# Altium PCB main.PcbDoc
Units mm, origin at the board's own origin, x right, y up, seen from the top; angles counter-clockwise.
Board outline 95 x 45.72 mm, 2 copper layers (Top Layer, Bottom Layer); 48 components, 29 nets, 216 pads, 31 vias.
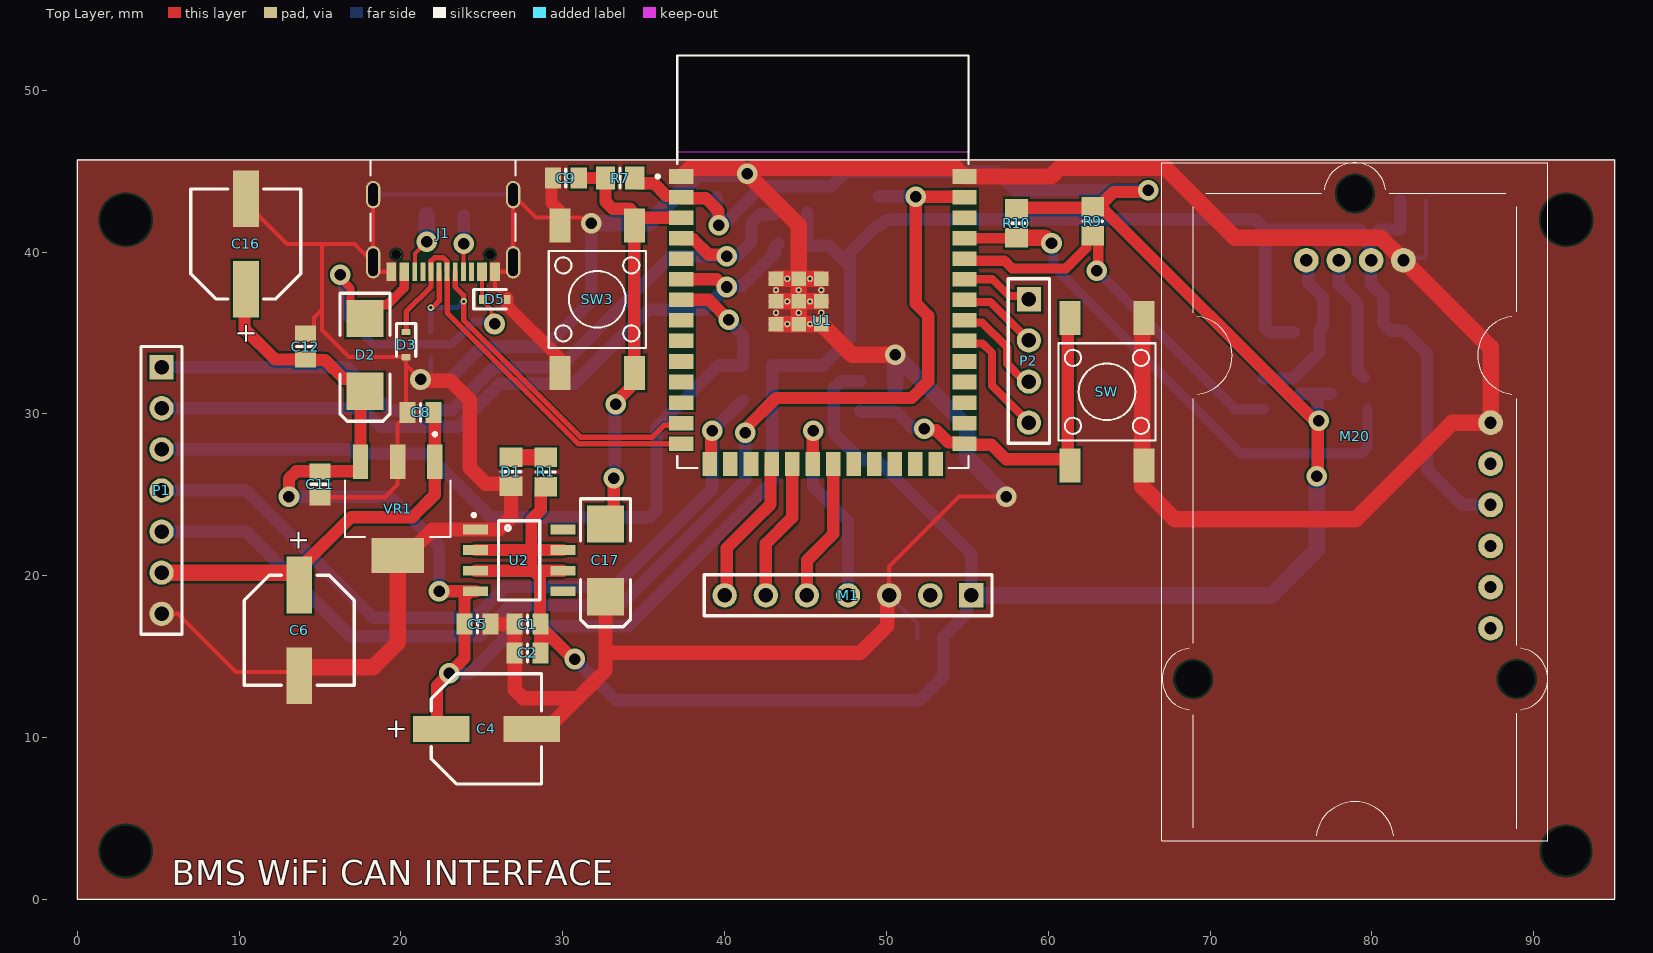
[diagram p0: Top Layer view]
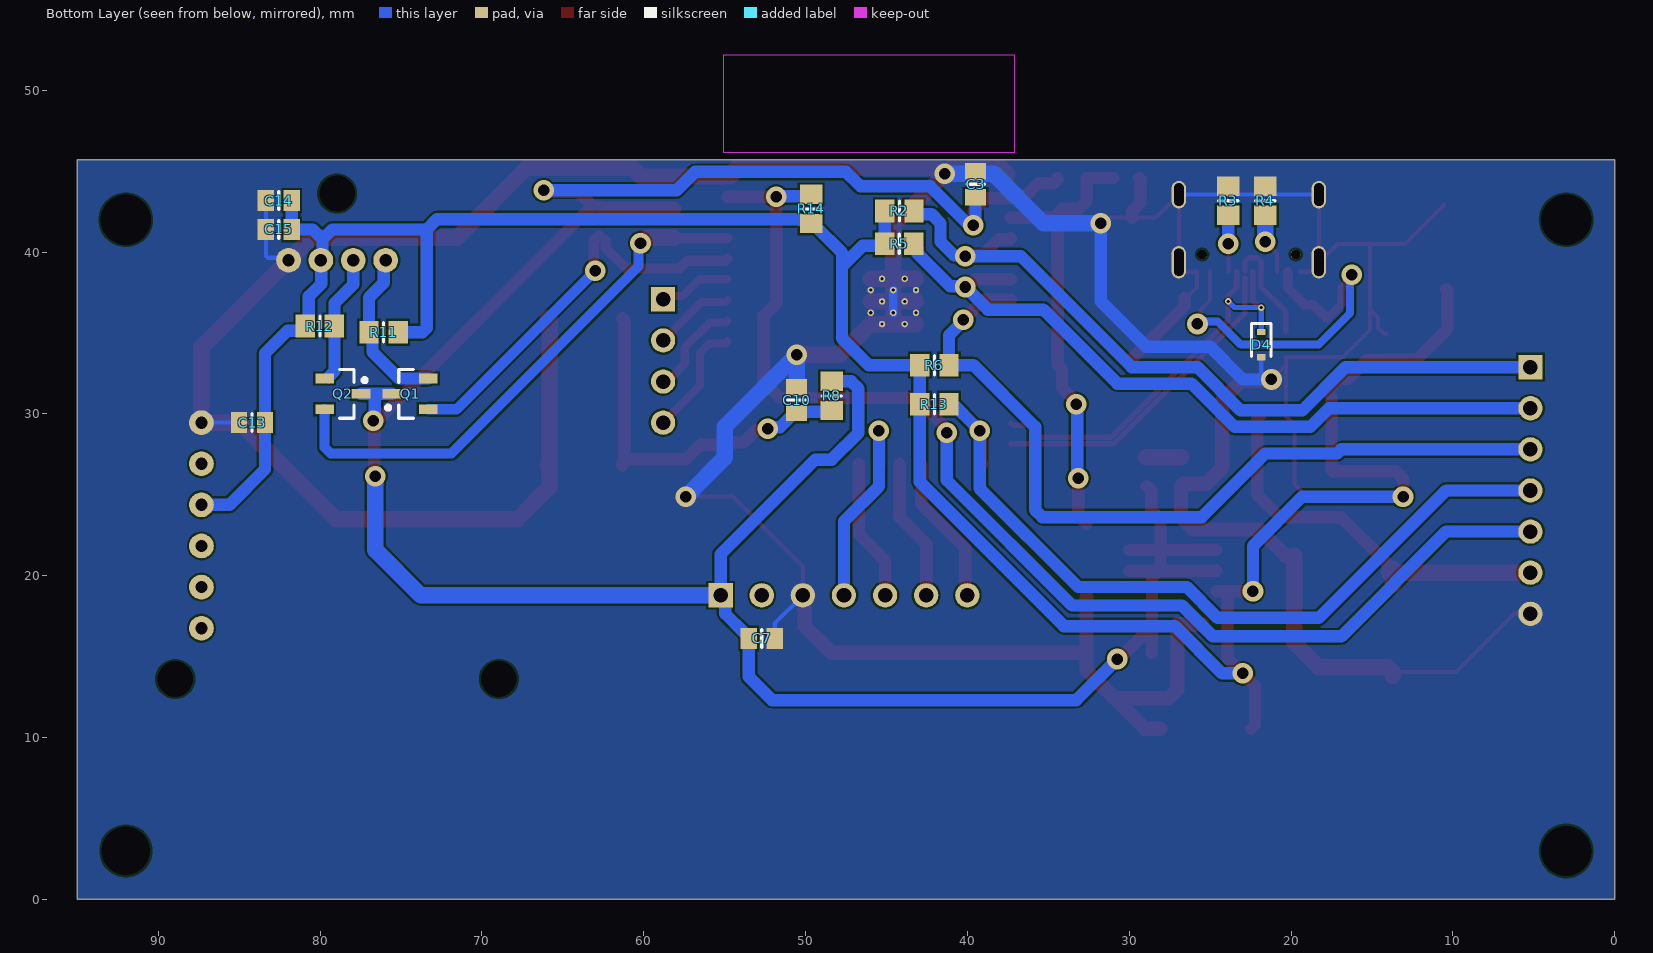
[diagram p1: Bottom Layer view, seen from below]

## Layer stack, top to bottom
Top Solder: solder mask 0.0102, Solder Resist, Dk 3.5
Top Layer: signal copper 0.0356
Dielectric 1: dielectric 0.32, FR-4, Dk 4.8
Bottom Layer: signal copper 0.0356
Bottom Solder: solder mask 0.0102, Solder Resist, Dk 3.5

## Board outline
0,0 0,45.72 95,45.72 95,0

## Design rules (kind name [scope] priority, off if disabled: settings)
Clearance Clearance_1 [InDifferentialPairClass('All Differential Pairs') And OnMid vs OnMid] p1: gap=0.076 ignorepadtopadclearanceinfootprint=FALSE sourcerule=54 cellrowname="All Differential Pairs" cellrowtype=4 cellcolname=All cellcoltype=0 innerlayers=TRUE
Clearance Clearance_2 [InDifferentialPairClass('All Differential Pairs') And (ExistsOnLayer('Top Layer') Or ExistsOnLayer('Bottom Layer')) vs (ExistsOnLayer('Top Layer') Or ExistsOnLayer('Bottom Layer'))] p2: gap=0.076 ignorepadtopadclearanceinfootprint=FALSE sourcerule=54 cellrowname="All Differential Pairs" cellrowtype=4 cellcolname=All cellcoltype=0 outerlayers=TRUE
Clearance Clearance_3 [InDifferentialPairClass('All Differential Pairs')] p3: gap=0.254 ignorepadtopadclearanceinfootprint=FALSE sourcerule=54 cellrowname="All Differential Pairs" cellrowtype=4 cellcolname=All cellcoltype=0
Clearance Clearance_1 [OnMid vs OnMid] p4: gap=0.127 ignorepadtopadclearanceinfootprint=FALSE sourcerule=54 cellrowname=All cellrowtype=0 cellcolname=All cellcoltype=0 innerlayers=TRUE
Clearance Clearance_2 [(ExistsOnLayer('Top Layer') Or ExistsOnLayer('Bottom Layer')) vs (ExistsOnLayer('Top Layer') Or ExistsOnLayer('Bottom Layer'))] p5: gap=0.127 ignorepadtopadclearanceinfootprint=FALSE sourcerule=54 cellrowname=All cellrowtype=0 cellcolname=All cellcoltype=0 outerlayers=TRUE
Clearance [All] p6: gap=0.254 ignorepadtopadclearanceinfootprint=FALSE ismatrix=TRUE miname0="All Differential Pairs" mitype0=4
DiffPairsRouting DiffPair_diff90DiffPairsRouting [InDifferentialPair('diff90')] p1: maxlimit=0.076 minlimit=0.076 mostfreqgap=0.076 toplayer_minwidth=0.33 toplayer_maxwidth=0.33 toplayer_prefwidth=0.33 bottomlayer_minwidth=0.33 bottomlayer_maxwidth=0.33 bottomlayer_prefwidth=0.33 maxuncoupledlength=2.54
DiffPairsRouting DifferentialPairsRouting_1 [InDifferentialPairClass('All Differential Pairs')] p2: maxlimit=0.254 minlimit=0.254 mostfreqgap=0.254 toplayer_minwidth=0.381 toplayer_maxwidth=0.381 toplayer_prefwidth=0.381 bottomlayer_minwidth=0.381 bottomlayer_maxwidth=0.381 bottomlayer_prefwidth=0.381 maxuncoupledlength=1.27
DiffPairsRouting [All] p3: maxlimit=0.254 minlimit=0.254 mostfreqgap=0.254 toplayer_minwidth=0.381 toplayer_maxwidth=0.381 toplayer_prefwidth=0.381 bottomlayer_minwidth=0.381 bottomlayer_maxwidth=0.381 bottomlayer_prefwidth=0.381 maxuncoupledlength=12.7
MatchedLengths DiffPair_diff90MatchedLengths [InDifferentialPair ('diff90')] p1: tolerance=25.4 checknetsindiffpair=FALSE checkdiffpairvsdiffpair=TRUE checkxsignals=TRUE checkothers=TRUE
PlaneConnect PowerPlaneConnectStyle_2 [All] p1: planeconnectstyle=Relief reliefexpansion=0.508 reliefentries=2 reliefconductorwidth=0.254 reliefairgap=0.254
PlaneConnect PowerPlaneConnectStyle_1 [All] p2: planeconnectstyle=Relief reliefexpansion=0.508 reliefentries=2 reliefconductorwidth=0.254 reliefairgap=0.254
PlaneConnect [All] p3: planeconnectstyle=Relief reliefexpansion=0.508 reliefentries=4 reliefconductorwidth=0.254 reliefairgap=0.254
PolygonConnect PolygonConnect_4 [All vs IsNamedPolygon('GND_L02_P000')] p1: connectstyle=Direct reliefconductorwidth=0.254 reliefentries=4 polygonreliefangle="90 Angle" airgapwidth=0.254
PolygonConnect PolygonConnect_3 [All vs IsNamedPolygon('GND_L01_P001')] p2: connectstyle=Direct reliefconductorwidth=0.254 reliefentries=4 polygonreliefangle="90 Angle" airgapwidth=0.254
PolygonConnect PolygonConnect_2 [All vs IsNamedPolygon('GND_L02_P000')] p3: thpad.connectstyle=Direct thpad.reliefconductorwidth=0.254 thpad.reliefentries=4 thpad.polygonreliefangle="90 Angle" thpad.airgapwidth=0.254 smdpad.connectstyle=Direct smdpad.reliefconductorwidth=0.254 smdpad.reliefentries=4 smdpad.polygonreliefangle="90 Angle" smdpad.airgapwidth=0.254 via.connectstyle=Relief via.reliefconductorwidth=0.254 via.reliefentries=4 via.polygonreliefangle="90 Angle" via.airgapwidth=0.254
PolygonConnect PolygonConnect_1 [All vs IsNamedPolygon('GND_L01_P001')] p4: thpad.connectstyle=Direct thpad.reliefconductorwidth=0.254 thpad.reliefentries=4 thpad.polygonreliefangle="90 Angle" thpad.airgapwidth=0.254 smdpad.connectstyle=Direct smdpad.reliefconductorwidth=0.254 smdpad.reliefentries=4 smdpad.polygonreliefangle="90 Angle" smdpad.airgapwidth=0.254 via.connectstyle=Relief via.reliefconductorwidth=0.254 via.reliefentries=4 via.polygonreliefangle="90 Angle" via.airgapwidth=0.254
PolygonConnect PolygonConnectStyle_1 [All] p5: connectstyle=Relief reliefconductorwidth=0.254 reliefentries=2 polygonreliefangle="0 Angle" airgapwidth=0.254
PolygonConnect [All] p6: connectstyle=Relief reliefconductorwidth=0.254 reliefentries=4 polygonreliefangle="90 Angle" airgapwidth=0.254
RoutingVias [All] p1: holewidth=0.711 width=1.27 viastyle="Through Hole" minholewidth=0.711 minwidth=1.27 maxholewidth=0.711 maxwidth=1.27
SolderMaskExpansion [All] p1: expansion=0.102 istentingtop=FALSE
SupplyNets "Schematic Supply Nets_3" [InNet('GND')] p1: voltage=0.000
SupplyNets "Schematic Supply Nets_2" [InNet('GND')] p2: voltage=0.000
SupplyNets "Schematic Supply Nets_1" [InNet('GND')] p3: voltage=0.000
SupplyNets "Schematic Supply Nets" [InNet('GND')] p4: voltage=0.000
Width MaxMinWidth_1 [InxNetClass('All xNets')] p1: maxlimit=1.016 minlimit=0.254 preferedwidth=0.254 minimp=50.000000 maximp=50.000000 favimp=50.000000
Width [All] p2: maxlimit=0.254 minlimit=0.254 preferedwidth=0.254
28 further rules are at their usual default settings.

## Classes and differential pairs
component class ESP32: C3 C9 C10 C13 C14 C15 C17 M20 P2 Q1 Q2 R7 R8 R9 R10 R11 R12 SW SW3 U1
component class Peripherals: C1 C2 C4 C5 C6 C7 C8 C11 C12 C16 D1 D2 D3 D4 D5 J1 M1 P1 R1 R2 R3 R4 R5 R6 R13 R14 U2 VR1
differential pair diff90: +D_P -D_N

## Components (designator, comment, footprint, x,y, rotation, side; value= is the part's Value field where it differs from the comment)
C1 "Cap" 6-0805_L 27.813,17.018 r0 top value=10uF
C2 "Cap" 6-0805_L 27.813,15.24 r0 top value=100nF
C3 "Cap" 6-0805_L 39.497,44.196 r270 bottom value=100nF
C4 "10uF" WCAP-ASLL_D6.3H5.5 25.279,10.541 r180 top
C5 "Cap" 6-0805_L 24.727,17.018 r180 top value=100nF
C6 "0.22uF" WCAP-ASLL_D6.3H5.5 13.716,16.631 r90 top
C7 "Cap" 6-0805_L 52.705,16.129 r0 bottom value=100nF
C8 "Cap" 6-0805_L 21.209,30.099 r0 top value=100nF
C9 "Cap" 6-0805_L 30.188,44.577 r0 top value=100nF
C10 "Cap" 6-0805_L 50.546,30.861 r270 bottom value=100nF
C11 "Cap" 6-0805_L 14.986,25.654 r90 top value=100nF
C12 "Cap" 6-0805_L 14.097,34.163 r270 top value=100nF
C13 "Cap" 6-0805_L 84.201,29.464 r180 bottom value=100nF
C14 "Cap" 6-0805_L 82.55,43.18 r180 bottom value=10uF
C15 "Cap" 6-0805_L 82.55,41.402 r180 bottom value=100nF
C16 "10uF" WCAP-ASLL_D6.3H5.5 10.414,40.507 r270 top
C17 "1uF" SMB 32.639,20.955 r270 top
D1 "LED2" 6-0805_N 26.797,26.427 r270 top
D2 "1N5819HW-7-F" SMB 17.78,33.655 r270 top
D3 "Schottky-Diode" SOD-523 20.32,34.29 r270 top value=Shottky-Diode
D4 "Schottky-Diode" SOD-523 21.844,34.29 r270 bottom value=Shottky-Diode
D5 "Schottky-Diode" SOD-523 25.794,37.084 r0 top value=Shottky-Diode
J1 "UJ20-C-H-C-4-SMT-TR" CUI_UJ20-C-H-C-4-SMT-TR 22.606,42.545 r180 top
M1 "Ada Fruit BME680" "Ada Fruit BME680" 60.325,21.336 r180 top
M20 "i2c_can_m" i2c_can_module 67.023,45.533 r270 top
P1 "Bms controller" HDR1X7 5.207,32.893 r270 top
P2 "JTAG" HDR1X4 58.801,37.084 r270 top
Q1 "NMOS-2" SOT23_N 74.44,31.242 r0 bottom
Q2 "NMOS-2" SOT23_N 78.595,31.242 r180 bottom
R1 "Res1" 6-0805_N 28.956,26.416 r90 top value=330
R2 "Res1" 6-0805_N 44.196,42.545 r0 bottom value=10k
R3 "Res1" 6-0805_N 23.876,43.18 r270 bottom value=10k
R4 "Res1" 6-0805_N 21.59,43.18 r270 bottom value=10k
R5 "Res1" 6-0805_N 44.207,40.513 r0 bottom value=10k
R6 "Res1" 6-0805_N 42.037,33.02 r0 bottom value=10k
R7 "Res1" 6-0805_N 33.539,44.577 r0 top value=10k
R8 "Res1" 6-0805_N 48.387,31.115 r90 bottom value=10k
R9 "Res1" 6-0805_N 62.738,41.91 r90 top value=10k
R10 "Res1" 6-0805_N 58.039,41.783 r270 top value=10k
R11 "Res1" 6-0805_N 76.073,35.052 r0 bottom value=10k
R12 "Res1" 6-0805_N 80.01,35.433 r180 bottom value=10k
R13 "Res1" 6-0805_N 42.037,30.607 r0 bottom value=10k
R14 "Res1" 6-0805_N 49.657,42.672 r270 bottom value=10k
SW "FSM2JSMA" FSM2JSMA 63.627,31.369 r90 top
SW3 "FSM2JSMA" FSM2JSMA 32.131,37.084 r270 top
U1 "ESP32-S3-WROOM-1-N8R2" XCVR_ESP32-S3-WROOM-1-N8R2 46.074,39.414 r0 top
U2 "LD1117D33TR" SOIC127P600X175-8N 27.305,20.955 r0 top
VR1 "LM7805MPX/NOPB" VREG_LM7805MPX/NOPB 19.798,24.151 r270 top

## Footprints (in the part's own frame and the unit in brackets; to place one, negate y for a bottom-side part, rotate by r counter-clockwise, add the part's x,y. Pads: shape width x height; smd on the part's side, far side on the other; paste and mask are expansions set on the pad)
6-0805_L [mm] "Chip Resistor, Body 2.0x1.2mm, IPC High Density"
  rect 1x1.3 smd: 1(-0.8,0) 2(0.8,0)
  silkscreen extent 0,-0.55 0,0.55, body extent -1.07,-0.7 1.07,0.7, height 0.7
6-0805_N [mm] "Chip Resistor, Body 2.0x1.2mm, IPC Medium Density"
  rect 1.2x1.4 smd: 1(-0.9,0) 2(0.9,0)
  silkscreen extent 0,-0.6 0,0.6, body extent -1.07,-0.7 1.07,0.7, height 0.7
"Ada Fruit BME680" [mm]
  rect 1.5x1.5 hole 0.9: 1(5.08,2.54)
  round 1.5 hole 0.9: 2(7.62,2.54) 3(10.16,2.54) 4(12.7,2.54) 5(15.24,2.54) 6(17.78,2.54) 7(20.32,2.54)
  silkscreen extent 3.81,1.27 21.59,3.81, body extent 0,0 25.4,17.78, height 4.53
CUI_UJ20-C-H-C-4-SMT-TR [mm]
  rect 0.6x1.14 smd mask+0.05: A1_B12(-3.2,3.76) A4_B9(-2.4,3.76) A9_B4(2.4,3.76) A12_B1(3.2,3.76)
  rect 0.3x1.14 smd mask+0.05: A5(-1.25,3.76) A6(-0.25,3.76) A7(0.25,3.76) A8(1.25,3.76) B5(1.75,3.76) B6(0.75,3.76) B7(-0.75,3.76) B8(-1.75,3.76)
  oval 0.9x1.7 hole 0.6 slot 1.4 at 90 deg: SH1(-4.325,-1.01) SH2(4.325,-1.01)
  oval 0.9x2 hole 0.6 slot 1.7 at 90 deg: SH3(-4.325,3.17) SH4(4.325,3.17)
  round 0.6 hole 0.6 unplated: ""(-2.89,2.69) ""(2.89,2.69)
  silkscreen extent -4.47,-3.1 4.47,1.85
FSM2JSMA [mm]
  rect 2.1x1.3 smd: P(-4.55,-2.3) P1(4.55,-2.3) S(-4.55,2.3) S1(4.55,2.3)
  silkscreen extent -3,-3 3,3
HDR1X4 [mm] "Connector; Header; 4 Position"
  rect 1.5x1.5 hole 0.9: 1(0,0)
  round 1.5 hole 0.9: 2(2.54,0) 3(5.08,0) 4(7.62,0)
  silkscreen extent -1.27,-1.27 8.89,1.27
HDR1X7 [mm] "Connector; Header; 7 Position"
  rect 1.5x1.5 hole 0.9: 1(0,0)
  round 1.5 hole 0.9: 2(2.54,0) 3(5.08,0) 4(7.62,0) 5(10.16,0) 6(12.7,0) 7(15.24,0)
  silkscreen extent -1.27,-1.27 16.51,1.27
i2c_can_module [mil]
  round 60 hole 30: 1(237.62,351.32) 2(237.62,430.06) 3(237.62,508.8) 4(237.62,587.54) 5(632.62,799.43) 6(732.62,799.43) 7(832.62,799.43) 8(932.62,799.43) 9(1032.62,799.43) 10(1132.62,799.43)
  round 50 hole 27.56: 3(237.62,508.8) 3(237.62,508.8) 4(237.62,587.54) 4(237.62,587.54)
  round 0 hole 86.61: 14(75.22,469.43) 14(1256.32,863.13) 14(1256.32,75.73)
  silkscreen extent 0,0 1650,938
SMB [mm] "DO-214-AA/SMB; 2 C-Bend Leads; Body 5.3 x 3.6 mm, inc. leads (LxW)"
  rect 2.3x2.3 smd: 1(-2.25,0) 2(2.25,0)
  silkscreen extent -3.8,-1.55 4.1,1.55
SOD-523 [mm] "SMD"
  rrect25% 0.4x0.55 smd: A(0.775,0) K(-0.775,0)
  silkscreen extent -1.3,-0.6 0.72,0.6, body extent -0.85,-0.43 0.85,0.42, height 0.7
SOIC127P600X175-8N [mm]
  rect 1.55x0.6 smd: 1(-2.7,1.905) 2(-2.7,0.635) 3(-2.7,-0.635) 4(-2.7,-1.905) 5(2.7,-1.905) 6(2.7,-0.635) 7(2.7,0.635) 8(2.7,1.905)
  silkscreen extent -2.9,-2.45 1.27,2.9, body extent -3,-2.45 3,2.45, height 1.75
SOT23_N [mm] "SOT23, 3-Leads, Body 2.9x1.3mm, Pitch 0.95mm, Lead Span 2.3mm - Reverse Pinning, IPC Medium Density"
  rect 1.15x0.6 smd: 1(1.125,0) 2(-1.125,-0.95) 3(-1.125,0.95)
  silkscreen extent -0.2,-1.5 1.48,1.5, body extent -0.7,-1.5 0.7,1.5, height 1.1
VREG_LM7805MPX/NOPB [mm]
  rect 2.15x0.95 smd: 1(-2.9,2.3) 2(-2.9,0) 3(-2.9,-2.3)
  rect 2.15x3.25 smd: 4(2.9,0)
  silkscreen extent -4.7,-3.25 1.75,3.25
WCAP-ASLL_D6.3H5.5 [mm] "Aluminium Electrolytic V-Chip SMT Capacitors, 6.3x5.5mm"
  rect 3.5x1.6 smd: 1(2.8,0) 2(-2.8,0)
  silkscreen extent -3.4,-3.4 3.4,3.4, body extent -3.65,-3.3 3.65,3.3, height 5.5
XCVR_ESP32-S3-WROOM-1-N8R2 [mm]
  rect 1.5x0.9 smd: 1(-8.75,5.26) 2(-8.75,3.99) 3(-8.75,2.72) 4(-8.75,1.45) 5(-8.75,0.18) 6(-8.75,-1.09) 7(-8.75,-2.36) 8(-8.75,-3.63) 9(-8.75,-4.9) 10(-8.75,-6.17) 11(-8.75,-7.44) 12(-8.75,-8.71) 13(-8.75,-9.98) 14(-8.75,-11.25) 27(8.75,-11.25) 28(8.75,-9.98) 29(8.75,-8.71) 30(8.75,-7.44) 31(8.75,-6.17) 32(8.75,-4.9) 33(8.75,-3.63) 34(8.75,-2.36) 35(8.75,-1.09) 36(8.75,0.18) 37(8.75,1.45) 38(8.75,2.72) 39(8.75,3.99) 40(8.75,5.26)
  rect 0.9x1.5 smd: 15(-6.985,-12.5) 16(-5.715,-12.5) 17(-4.445,-12.5) 18(-3.175,-12.5) 19(-1.905,-12.5) 20(-0.635,-12.5) 21(0.635,-12.5) 22(1.905,-12.5) 23(3.175,-12.5) 24(4.445,-12.5) 25(5.715,-12.5) 26(6.985,-12.5)
  rect 0.9x0.9 smd: 41_1(-1.5,-2.46) 41_2(-2.9,-2.46) 41_3(-0.1,-2.46) 41_4(-2.9,-3.86) 41_5(-1.5,-3.86) 41_6(-0.1,-3.86) 41_7(-2.9,-1.06) 41_8(-1.5,-1.06) 41_9(-0.1,-1.06)
  round 0.4 hole 0.2 mask+0: 41_10(-1.5,-1.76) 41_11(-2.9,-1.76) 41_12(-0.1,-1.76) 41_13(-2.9,-3.16) 41_14(-1.5,-3.16) 41_15(-0.1,-3.16) 41_16(-2.2,-1.06) 41_17(-0.8,-1.06) 41_18(-2.2,-2.46) 41_19(-0.8,-2.46) 41_20(-2.2,-3.86) 41_21(-0.8,-3.86)
  Keep-Out Layer region: 9,6.75 -9,6.75 -9,12.75 9,12.75
  Keep-Out Layer region: 9,6.75 -9,6.75 -9,12.75 9,12.75
  silkscreen extent -10.3,-12.75 9,12.75, body extent -9,-12.75 9,12.75, height 3.25

## Part data
C1 C2 C3 C5 C7 C8 C9 C10 C11 C12 C13 C14 C15: "Capacitor", LatestRevisionDate=17-Jul-2002, LatestRevisionNote="Re-released for DXP Platform.", PackageDescription="Radial Cap, Thru-Hole; 2 Leads; 0.3 in Pin Spacing", PackageReference=RAD-0.3, Published=8-Jun-2000, Publisher="Altium Limited"
C4 C16: library part 865060643005, "WCAP-ASLL Aluminum Electrolytic Capacitor, V-Chip, SMT, D6.3 x H5.5mm, 10uF, 50V", Capacitance Tolerance=+/-20%, Leakage Current=5uA, Manufacturer="Wurth Elektronik", Operating Temperature Max=105°C, Operating Temperature Min=-55°C, Rated Voltage (DC)=50V, Ripple Current=165mA, Capacitance=10uF, Category="Aluminum Electrolytic Capacitors", ComponentLink1Description="Website Link", ComponentLink1URL=https://www.we-online.com/redexpert/article/865060643005?ad, ComponentLink2Description="Datasheet Link", ComponentLink2URL=https://www.we-online.com/redexpert/spec/865060643005?ad, Diameter=6.3mm, Dissipation Factor=12%, Endurance=2000h, Height=5.5mm, Manufacturer Part Number=865060643005, Match Code=WCAP-ASLL, Mount="Surface Mount", Packaging="Tape and Reel", Technical Reference=ASED055100M050DVCTBB000
C6 C17: library part 865060643005, "WCAP-ASLL Aluminum Electrolytic Capacitor, V-Chip, SMT, D6.3 x H5.5mm, 10uF, 50V", Capacitance=10uF, Capacitance Tolerance=+/-20%, Leakage Current=5uA, Manufacturer="Wurth Elektronik", Operating Temperature Max=105°C, Operating Temperature Min=-55°C, Rated Voltage (DC)=50V, Ripple Current=165mA, Category="Aluminum Electrolytic Capacitors", ComponentLink1Description="Website Link", ComponentLink1URL=https://www.we-online.com/redexpert/article/865060643005?ad, ComponentLink2Description="Datasheet Link", ComponentLink2URL=https://www.we-online.com/redexpert/spec/865060643005?ad, Diameter=6.3mm, Dissipation Factor=12%, Endurance=2000h, Height=5.5mm, Manufacturer Part Number=865060643005, Match Code=WCAP-ASLL, Mount="Surface Mount", Packaging="Tape and Reel", Technical Reference=ASED055100M050DVCTBB000
D1: "Typical RED, GREEN, YELLOW, AMBER GaAs LED", LatestRevisionDate=17-Jul-2002, LatestRevisionNote="Re-released for DXP Platform.", PackageDescription="SM LED; 2 Flat Leads", PackageReference=3.2X1.6X1.1, PackageVersion=Feb-2002, Published=8-Jun-2000, Publisher="Altium Limited"
D2: library part "D Schottky", "Schottky Diode", Code_JEDEC=DO-214-AA, LatestRevisionDate=17-Jul-2002, LatestRevisionNote="Re-released for DXP Platform.", PackageDescription="DO-214-AA/SMB; 2 C-Bend Leads; Body 5.3 x 3.6 mm, inc. leads (LxW)", PackageReference=SMB, Published=8-Jun-2000, Publisher="Altium Limited"
J1: Package=None, Availability=Unavailable, MP=UJ20-C-H-C-4-SMT-TR, Price=None
M1: "BME680 sensor module"
M20: "i2c_can_module"
P1: library part "Header 7", "Header, 7-Pin", LatestRevisionDate=17-Jul-2002, LatestRevisionNote="Re-released for DXP Platform.", Publisher="Altium Limited"
P2: library part "Header 4", "Header, 4-Pin", LatestRevisionDate=17-Jul-2002, LatestRevisionNote="Re-released for DXP Platform.", Publisher="Altium Limited"
Q1 Q2: "N-Channel Power MOSFET", ComponentLink1Description="Manufacturer Link", ComponentLink1URL=http://www.irf.com/, DatasheetVersion=PD-9.814, LatestRevisionDate=17-Jul-2002, LatestRevisionNote="Re-released for DXP Platform.", Note="Pin 2 is electrically connected to pin 4.", PackageDescription="TO, Thru-Hole, Vertical, Heatsink Mounted; 3 In-Line Leads; Pitch 2.54 mm", PackageReference=TO-220AB, PackageVersion=Feb-1997, Published=8-Jun-2000, Publisher="Altium Limited"
R1 R2 R3 R4 R5 R6 R7 R8 R9 R10 R11 R12 R13 R14: "Resistor", LatestRevisionDate=17-Jul-2002, LatestRevisionNote="Re-released for DXP Platform.", PackageDescription="Axial Device, Thru-Hole; 2 Leads; 0.3 in Pin Spacing", PackageReference=AXIAL-0.3, Published=8-Jun-2000, Publisher="Altium Limited"
SW SW3: "Tactile Switch SPST-NO Top Actuated Surface Mount", Package=None, Availability=Unavailable, MF="TE Connectivity", MP=FSM-2J-SMA, Price=None, SnapEDA_Link=https://www.snapeda.com/parts/FSM-2J-SMA/TE%20Connectivity%20ALCOSWITCH%20Switches/view-part/524299/?ref=snap, TE_purchase_URL=https://www.te.com/usa-en/product-FSM-2J-SMA.html?te_bu=Cor&te_type=disp&te_campaign=seda_glo_cor-seda-global-disp-prtnr-fy19-seda-model-bom-cta_sma-317_1&elqCampaignId=32493
U1: "WiFi 802.11a/b/g/n, Bluetooth v5.0 Transceiver Module 2.4GHz Antenna Not Included -", Package="- Espressif Systems", Availability="In Stock", Check_prices=https://www.snapeda.com/parts/ESP32-S3-WROOM-1-N8R2/Espressif+Systems/view-part/?ref=eda, MF="Espressif Systems", MP=ESP32-S3-WROOM-1-N8R2, Price=None, Purchase-URL=https://pricing.snapeda.com/search?q=ESP32-S3-WROOM-1-N8R2&ref=eda, SnapEDA_Link=https://www.snapeda.com/parts/ESP32-S3-WROOM-1-N8R2/Espressif+Systems/view-part/?ref=snap
U2: "Linear Voltage Regulator IC Positive Fixed 1 Output 800mA 8-SOIC", Package="SO-8 STMicroelectronics", Check_prices=https://www.snapeda.com/parts/LD1117D33TR/STMicroelectronics/view-part/?ref=eda, MF=STMicroelectronics, MP=LD1117D33TR, SnapEDA_Link=https://www.snapeda.com/parts/LD1117D33TR/STMicroelectronics/view-part/?ref=snap
VR1: "1.5-A, 30-V, linear voltage regulator 4-SOT-223 0 to 125", Package=None, Availability=Unavailable, MP=LM7805MPX/NOPB, Price=None
D3 D4 D5: datasheet=https://diotec.com/de/produktliste/SBD.html, ki_description="Schottky Diode", ki_keywords=Schottky, Reference=D

## Free pads (board coordinates)
  oval 0x1.524 hole 3.1: 2(92,42) 5(3,42)
  oval 0x1.524 hole 3: 3(92,3)
  round 0 hole 3.1: 4(3,3)

## Via types
v1: diameter 1.27, hole 0.711, Top Layer to Bottom Layer, 29 vias
v2: diameter 0.4, hole 0.2, Top Layer to Bottom Layer, 2 vias

## Nets (pads, with @x,y where several pads share a name; then routed paths per layer and width w, separated by ;. In a path a pad name is that pad's centre, name@x,y a point inside that pad or via, vN(x,y) a via of type N, cw(c..) or ccw(c..) an arc to the next point about the centre after c; other vN are vias at no path point)
CLK: P2.4 U1.32 | length 7.3
  Top Layer w0.508: U1.32 54.975,34.363 55.934,34.363 56.515,33.782 56.515,31.75 P2.4
D_N: D4.K J1.A7 J1.B7 U1.13 | length 26.2
  Top Layer w0.33: v2(21.844,36.576) 21.857,36.589 21.964,36.589 22.356,36.982 J1.A7 ; J1.B7 23.356,37.858 23.876,37.338 v2(23.876,36.957) 23.876,35.801 31.107,28.57 35.543,28.57 36.282,29.31 37.2,29.31 U1.13
  Bottom Layer w0.33: D4.K v2(21.844,36.576) 23.495,36.576 v2(23.876,36.957)
D_P: D3.K J1.A6 J1.B6 U1.14 | length 26.7
  Top Layer w0.33: D3.K 20.32,36.322 21.856,37.858 J1.B6 ; J1.B6@21.838,38.803 21.838,39.412 22.073,39.647 22.627,39.647 22.841,39.433 J1.A6@22.841,38.8 ; J1.A6@22.856,38.38 22.856,36.246 30.938,28.164 U1.14
"Enable Cell Balance": P1.3 R6.1 U1.7 | length 51.2
  Top Layer w0.762: U1.7 39.019,37.054 v1(40.259,35.814)
  Bottom Layer w0.762: P1.3 16.891,27.813 17.145,27.559 21.59,27.559 25.527,23.622 35.368,23.622 35.814,24.068 35.814,29.21 39.624,33.02 R6.1 41.137,34.863 40.259,35.741 v1(40.259,35.814)
"Enable Charge": P1.4 R13.1 U1.15 | length 49
  Top Layer w0.762: U1.15 39.158,26.983 39.158,28.871 v1(39.243,28.956)
  Bottom Layer w0.762: P1.4 10.414,25.273 18.288,17.399 24.535,17.399 26.44,19.304 33.147,19.304 39.243,25.4 v1(39.243,28.956) ; v1@39.238,28.961 R13.1@41.137,30.861
"Enable Discharge": P1.5 R14.1 U1.39 | length 75.2
  Top Layer w0.762: v1@41.275,29.083 43.18,30.988 51.562,30.988 52.578,32.004 52.578,36.068 51.816,36.83 v1(51.816,43.434) 51.831,43.419 54.809,43.419 U1.39
  Bottom Layer w0.762: P1.5 10.414,22.733 16.891,16.256 24.829,16.256 26.734,18.161 33.528,18.161 41.275,25.908 v1(41.275,28.829) ; R14.1@49.53,43.445 51.805,43.445 v1(51.816,43.434)
ESP32_RX: Q1.3 R9.1 U1.36 | length 25
  Top Layer w0.635: U1.36 54.957,39.461 57.3,39.461 57.772,38.989 61.087,38.989 62.355,40.257 R9.1@62.355,40.728 ; R9.1 62.797,41.01 63.08,40.728 63.08,38.95 v1(62.992,38.862)
  Bottom Layer w0.635: v1(62.992,38.862) 66.957,34.897 71.562,30.292 Q1.3
ESP32_TX: Q2.2 R10.2 U1.37 | length 33.3
  Top Layer w0.635: U1.37 R10.2@57.755,40.864
  Top Layer w1.016: R10.2@58.139,40.883 59.799,40.883 60.129,40.553 v1(60.198,40.553)
  Bottom Layer w0.635: v1(60.198,40.553) 60.32,40.431 60.32,39.121 71.882,27.559 79.348,27.559 79.72,27.931 Q2.2
FSPI_CLK: M1.4 U1.20 | length 12.5
  Top Layer w0.762: U1.20 45.452,26.928 45.452,28.942 v1(45.466,28.956)
  Bottom Layer w0.762: v1@45.466,28.702 45.466,25.527 47.625,23.368 M1.4@47.625,19.177
FSPI_CS: M1.7 U1.18 | length 9.3
  Top Layer w0.762: M1.7@40.132,18.796 40.132,21.717 41.91,23.495 42.83,24.415 42.83,26.845 U1.18
FSPI_MISO_SPIQ: M1.5 U1.21 | length 8.8
  Top Layer w0.762: M1.5 45.085,20.955 46.709,22.579 U1.21
FSPI_MOSI_SPID: M1.6 U1.19 | length 8.8
  Top Layer w0.762: M1.6 42.545,21.971 44.169,23.595 U1.19
GND: C1.1 C2.1 C3.1 C4.2 C5.1 C6.2 C7.1 C8.1 C9.1 C10.1 C11.1 C12.1 C13.1 C14.1 C15.1 C16.2 C17.2 D1.2 D3.A D4.A D5.A J1.A1_B12 J1.A12_B1 J1.SH1 J1.SH2 J1.SH3 J1.SH4 M1.3 M20.4 M20.5 P1.7 R3.1 R4.1 SW3.P SW3.P1 SW.P SW.P1 U1.1 U1.40 U1.41_1 U1.41_2 U1.41_3 U1.41_4 U1.41_5 U1.41_6 U1.41_7 U1.41_8 U1.41_9 U1.41_10 U1.41_11 U1.41_12 U1.41_13 U1.41_14 U1.41_15 U1.41_16 U1.41_17 U1.41_18 U1.41_19 U1.41_20 U1.41_21 U2.1 VR1.2 VR1.4 | length 342.4
  Top Layer w0.254: P1.7 6.223,17.653 9.817,14.059 C6.2@13.716,14.059 ; C16.2@10.541,42.926 12.954,40.513 15.262,40.513 ; C12.1 14.247,34.963 14.62,35.336 14.62,35.956 15.113,36.449 ; C11.1 19.012,24.854 19.798,25.64 VR1.2 19.798,29.338 20.409,29.949 C8.1 ; J1.SH2 J1.SH4 ; J1.A12_B1 18.579,38.785 18.281,39.083 J1.SH4 ; C8.1@20.32,30.137 20.32,33.02 ; v1(21.209,32.131) 20.32,33.02 ; D5.A@26.569,37.159 26.496,37.232 26.421,37.232 25.806,37.847 J1.A1_B12 26.633,38.785 26.931,39.083 J1.SH3 J1.SH1@26.931,43.33 ; J1.SH1 J1.SH1@26.931,43.33 ; v1(31.75,41.783) 31.475,41.783 31.124,42.134 29.817,42.134 28.352,42.134 27.455,43.031 27.229,43.031 J1.SH1@26.931,43.33 ; M1.3 50.165,20.574 54.483,24.892 v1(57.404,24.892) ; 15.113,36.449 15.113,40.364 15.262,40.513 ; 15.113,36.449 15.113,35.179 16.777,33.515 D3.A 20.32,33.02 ; 15.262,40.513 17.143,40.513 J1.SH4
  Top Layer w0.762: D5.A@26.569,37.159 D5.A 26.569,36.682 29.817,33.434 SW3.P1@29.817,33.034 ; C9.1 29.303,44.492 29.303,43.048 29.817,42.534 SW3.P@29.817,42.134
  Top Layer w0.889: VR1.4 20.348,21.251 21.957,22.86 U2.1 26.035,22.86 26.797,23.622 D1.2 26.641,25.683 25.244,25.683 24.257,26.67 24.257,30.861 23.06,32.058 21.282,32.058 v1(21.209,32.131) ; C5.1 C1.1 C2.1 27.038,15.215 27.038,12.967 27.559,12.446 30.934,12.446 ; C4.2 29.029,10.541 30.934,12.446 ; 31.76,13.272 30.934,12.446 ; 31.823,13.335 32.639,14.151 ; 32.639,14.24 32.639,15.24 ; C17.2 32.639,15.24 ; M1.3 50.048,18.679 50.048,16.901 48.387,15.24 32.639,15.24
  Top Layer w1.016: C6.2 13.716,14.059 14.008,14.351 18.288,14.351 19.798,15.861 VR1.4 ; U1.1@37.566,44.732 37.566,44.877 37.901,45.212 40.952,45.212 41.274,44.89 41.509,44.89 41.831,45.212 54.247,45.212 54.582,44.877 54.582,44.732 54.766,44.732 U1.40 60.168,44.674 60.706,45.212 67.225,45.212 71.543,40.894 80.549,40.894 81.946,39.497 87.328,34.115 M20.5 84.963,29.464 78.994,23.495 67.818,23.495 65.8,25.513 65.8,26.692 SW.P 65.8,26.946 65.8,35.792 SW.P1 ; v1(41.392,44.841) 44.574,41.659 U1.41_8 ; U1.41_4 U1.41_20 U1.41_5 ; U1.41_2 U1.41_18 U1.41_1 ; U1.41_7 U1.41_16 U1.41_8 ; U1.41_3 U1.41_19 U1.41_1 ; U1.41_9 U1.41_17 U1.41_8 ; v1(50.546,33.655) 47.873,33.655 U1.41_6 U1.41_21 U1.41_5 ; U1.41_5 U1.41_14 U1.41_1 ; U1.41_1 U1.41_10 U1.41_8
  Bottom Layer w0.254: J1.SH2 J1.SH1 ; v1(21.209,32.131) 21.359,32.281 21.844,32.281 D4.A ; M1.3 51.905,17.056 C7.1 ; M20.4@81.946,39.497 82.104,39.655 83.238,39.655 83.35,39.767 C15.1 C14.1 ; C13.1 M20.5
  Bottom Layer w0.508: U1.41_14 U1.41_10
  Bottom Layer w0.762: v1(21.209,32.131) 22.987,32.131 25.019,34.163 28.956,34.163 31.75,36.957 v1(31.75,41.783)
  Bottom Layer w1.016: v1(31.75,41.783) 35.306,41.783 38.354,44.831 41.381,44.831 v1(41.392,44.841) ; C10.1 v1(50.546,33.655) 54.991,29.21 54.991,27.305 v1(57.404,24.892)
GPIO0: C10.2 R8.1 SW.S SW.S1 U1.27 | length 23.2
  Top Layer w0.762: v1(52.324,29.083) 52.421,28.986 53.085,28.986 53.838,28.233 54.755,28.233 54.893,28.095 56.487,28.095 57.382,27.2 61.058,27.2 61.327,26.931 SW.S ; SW.S@61.2,27.2 61.2,35.792 SW.S1
  Bottom Layer w0.762: R8.1 48.464,30.138 50.469,30.138 C10.2 50.696,30.061 51.577,29.18 52.227,29.18 v1(52.324,29.083)
NetC9_2: C9.2 C17.1 R7.1 SW3.S SW3.S1 U1.3 | length 28
  Top Layer w0.762: C9.2 R7.1 32.639,43.118 33.085,42.672 34.148,42.672 34.417,42.403 SW3.S@34.417,42.134 ; C17.1 33.147,23.713 v1(33.147,26.035) ; v1(33.274,30.607) 33.274,30.744 34.148,31.618 34.148,32.765 34.417,33.034 SW3.S@34.417,42.134 ; U1.3 SW3.S@34.417,42.134
  Bottom Layer w0.762: v1(33.147,26.035) 33.21,26.098 33.21,30.543 v1(33.274,30.607)
NetD1_1: D1.1 R1.2 | length 2.2
  Top Layer w1.016: D1.1 26.802,27.321 28.95,27.321 R1.2
NetD2_1: D2.1 D5.K J1.A4_B9 J1.A9_B4 | length 24.4
  Top Layer w0.254: J1.A4_B9 25.013,38.779 25.013,37.09 D5.K 25.019,37.009 25.587,36.441 25.587,35.754 v1(25.781,35.56)
  Top Layer w0.508: v1(16.256,38.608) 16.256,38.402 16.884,37.774 16.884,36.801 D2.1
  Top Layer w0.584: D2.1 18.638,36.763 19.173,36.763 20.206,37.796 J1.A9_B4
  Bottom Layer w0.508: v1(16.256,38.608) 16.355,38.509 16.355,36.223 18.288,34.29 23.114,34.29 24.53,35.706 25.635,35.706 v1(25.781,35.56)
NetJ1_A5: J1.A5 R3.2 | length 3.5
  Top Layer w0.254: J1.A5 23.866,38.795 23.866,40.503 v1(23.876,40.513)
  Bottom Layer w0.762: v1(23.876,40.513) R3.2
NetJ1_B5: J1.B5 R4.2 | length 3.8
  Top Layer w0.254: J1.B5 20.856,39.906 v1(21.59,40.64)
  Bottom Layer w1.016: v1(21.59,40.64) R4.2
NetM20_1: M20.1 Q1.2 R11.2 | length 10.4
  Bottom Layer w0.762: Q1.2 75.118,32.192 76.754,33.828 76.754,35.214 76.973,35.433 76.973,37.2 76.073,38.1 76.073,39.243 M20.1@75.819,39.497
NetM20_2: M20.2 Q2.3 R12.2 | length 7.9
  Bottom Layer w0.762: M20.2 77.946,38.005 79.11,36.841 R12.2 79.11,32.638 Q2.3@79.49,32.258
"Reserve 1": P1.1 R2.1 U1.4 | length 48.2
  Top Layer w0.762: U1.4 37.393,40.795 38.062,40.795 39.008,39.848 40.035,39.848 v1(40.132,39.751)
  Bottom Layer w0.762: P1.1 16.637,32.893 19.304,30.226 23.114,30.226 25.781,32.893 29.845,32.893 36.703,39.751 v1(40.132,39.751) 40.178,39.797 40.813,39.797 41.656,40.64 41.656,41.783 42.219,42.346 43.097,42.346 R2.1
"Reserve 2": P1.2 R5.1 U1.6 | length 46.5
  Top Layer w0.762: U1.6 39.517,38.324 39.995,37.846 v1(40.132,37.846)
  Bottom Layer w0.762: P1.2 17.653,30.353 18.796,29.21 23.495,29.21 26.162,31.877 30.734,31.877 35.306,36.449 38.735,36.449 40.183,37.897 41.072,37.897 43.088,39.913 43.088,40.294 R5.1
TDI: P2.2 U1.34 | length 5
  Top Layer w0.508: U1.34 54.957,36.921 56.424,36.921 P2.2
TDO: P2.3 U1.33 | length 5.8
  Top Layer w0.508: U1.33 54.957,35.651 55.916,35.651 57.468,34.1 57.468,33.084 58.42,32.131 P2.3@58.42,32.004
TMS: P2.1 U1.35 | length 4.2
  Top Layer w0.508: U1.35 56.545,38.324 57.587,37.282 58.305,37.282 58.42,37.167 P2.1@58.42,37.084
vcc_3.3v: C1.2 C2.2 C3.2 C7.2 M1.1 Q1.1 Q2.1 R1.1 R7.2 R8.2 R9.2 R10.1 U1.2 U2.2 U2.3 U2.6 U2.7 | length 171.9
  Top Layer w0.762: U2.3 28.194,20.32 ; U2.2 28.067,21.59 ; C2.2 C1.2@28.613,16.868 ; R1.1 28.856,25.516 28.637,25.297 28.637,24.065 28.067,23.495 28.067,21.59 ; U2.6 28.194,20.32 ; U2.7 28.067,21.59 ; v1(30.734,14.859) 30.622,14.859 C1.2@28.613,16.868 ; R7.2 34.439,44.477 34.658,44.258 35.625,44.258 36.41,43.473 37.255,43.473 37.393,43.335 38.834,43.335 39.624,42.545 v1(39.624,41.656) ; R10.1 58.103,42.746 62.674,42.746 R9.2 ; R9.2@63.13,42.81 64.038,43.718 66.07,43.718 v1(66.167,43.815) ; 63.454,42.591 76.357,29.688 76.611,29.688 v1(76.708,29.591) 76.644,29.527 76.644,26.226 v1(76.581,26.162) ; 28.067,21.59 28.067,20.447 28.194,20.32 ; 28.194,20.32 28.595,19.919 28.595,17.036 C1.2 C1.2@28.613,16.868
  Bottom Layer w0.508: C7.2 53.505,16.204 53.505,16.279 53.751,16.525 53.826,16.525 C7.2@53.901,16.525 ; M1.1@54.958,18.509 M1.1
  Bottom Layer w0.762: v1(30.734,14.859) 33.274,12.319 52.07,12.319 53.505,13.754 C7.2 ; C3.2 39.497,41.92 39.624,41.793 v1(39.624,41.656) ; v1@40.015,41.783 42.301,44.069 46.609,44.069 47.498,44.958 56.827,44.958 57.97,43.815 v1(66.167,43.815) ; R8.2 47.182,32.015 46.736,31.569 46.736,28.829 48.387,27.178 49.403,27.178 55.245,21.336 M1.1 ; C7.2@53.505,16.204 53.826,16.525 54.958,17.657 M1.1@54.958,18.509 ; Q1.1 76.517,31.242 ; v1(76.708,29.591) 76.611,29.688 76.611,31.149 76.517,31.242 ; Q2.1 76.517,31.242
  Bottom Layer w1.016: M1.1 73.787,18.796 76.581,21.59 v1(76.581,26.162)
vcc_5v: C4.1 C5.2 C11.2 C12.2 C13.2 C14.2 C15.2 C16.1 D2.2 M20.3 M20.7 R2.2 R5.2 R6.2 R11.1 R12.1 R13.2 R14.2 U2.4 VR1.3 | length 161.7
  Top Layer w0.762: C16.1 10.333,37.626 10.333,35.26 12.23,33.363 C12.2 14.128,33.332 15.309,33.332 16.467,32.174 17.011,32.174 D2.2 17.498,31.123 17.498,26.548 17.404,26.454 15.24,26.454 13.527,26.454 13.081,26.008 v1(13.081,24.892) ; v1(22.352,19.05) U2.4@24.292,19.05 ; C4.1 22.225,10.795 22.225,13.208 23.927,14.91 C5.2 23.927,18.685 U2.4@24.292,19.05 ; U2.4 U2.4@24.292,19.05
  Bottom Layer w0.762: v1(13.081,24.892) 19.304,24.892 22.352,21.844 v1(22.352,19.05) ; v1(22.987,13.97) 24.257,13.97 27.178,16.891 34.036,16.891 42.937,25.792 42.937,30.861 R6.2 46.101,33.02 47.752,34.671 47.752,39.116 ; R2.2@45.096,42.445 45.096,40.386 46.482,40.386 47.752,39.116 ; R11.1 73.666,35.052 73.406,35.312 73.406,41.402 ; M20.3@79.916,39.4 79.916,38.051 80.691,37.276 80.691,35.652 R12.1 80.91,35.362 81.129,35.143 82.013,35.143 83.401,33.755 83.401,26.581 85.598,24.384 M20.7 ; M20.3@79.946,39.497 79.849,39.594 79.849,40.801 ; C14.2 C15.2 80.45,41.402 79.849,40.801 ; 47.752,39.116 47.752,39.967 49.43,41.645 49.63,41.645 49.976,41.991 50.376,41.991 50.422,42.037 72.771,42.037 73.406,41.402 ; 73.406,41.402 79.248,41.402 79.849,40.801
vcc_12v: C6.1 C8.2 P1.6 VR1.1 | length 25.2
  Top Layer w0.762: C6.1@13.716,20.429 13.764,20.429 14.135,20.8 14.135,20.848 16.909,23.622 20.701,23.622 22.098,25.019 VR1.1 22.098,29.733 21.882,29.949 C8.2@21.882,30.099
  Top Layer w1.016: P1.6 C6.1@13.97,20.193 ; C6.1 C6.1@13.716,20.429
pads on no net: J1. J1.A8 J1.B8 M1.2 M20.6 M20.8 M20.9 M20.10 M20.14 U1.5 U1.8 U1.9 U1.10 U1.11 U1.12 U1.16 U1.17 U1.22 U1.23 U1.24 U1.25 U1.26 U1.28 U1.29 U1.30 U1.31 U1.38 U2.5 U2.8

## Polygon pours and split planes (outlines as drawn)
GND on Bottom Layer "GND_L02_P000" (solid, remove dead copper, pour order 0): 95,45.72 95,0 0,0 0,45.72
GND on Top Layer "GND_L01_P001" (solid, remove dead copper, pour order 1): 95,45.72 95,0 0,0 0,45.72

## Silkscreen, mask and mechanical layers (free items; w line width, h text height)
Top Overlay:
  the board outline again, w0.025
  text "BMS WiFi CAN INTERFACE" at 5.842,0.889 h1.52

## Text inside footprints (layer, text, board x,y; h text height)
C4: Top Overlay "+" at 20.429,11.041 h1.22 r180
C6: Top Overlay "+" at 14.216,21.481 h1.22 r90
C16: Top Overlay "+" at 9.914,35.657 h1.22 r270
U1: Mechanical 13 "ANTENNA" at 41.574,48.914 h1.27